# Altium PCB PCB1.PcbDoc
Units mil, origin at the board's own origin, x right, y up, seen from the top; angles counter-clockwise.
Board outline 1825.03 x 1420.03 mil, 2 copper layers (Top Layer, Bottom Layer); 34 components, 24 nets, 110 pads, 193 vias.
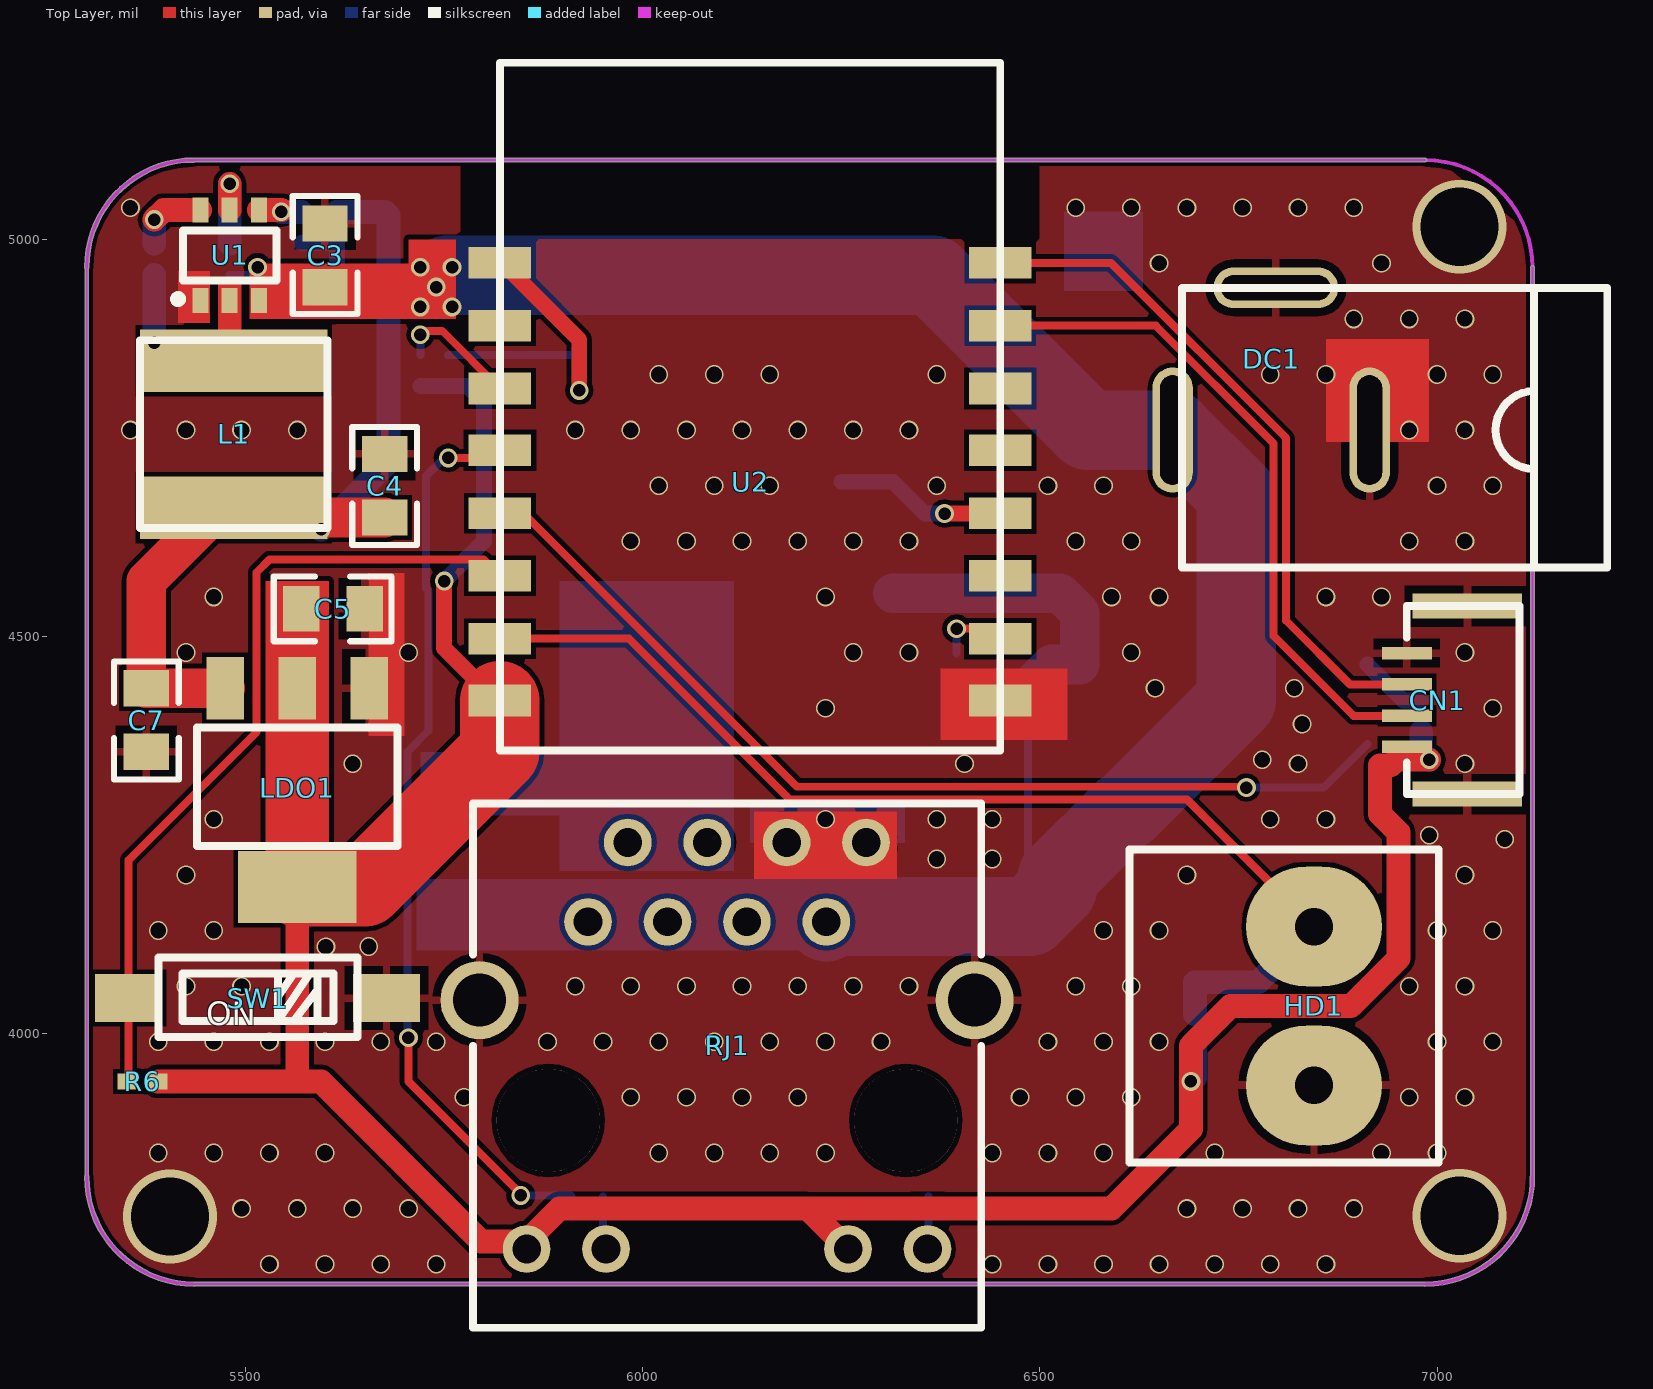
[diagram p0: Top Layer view]
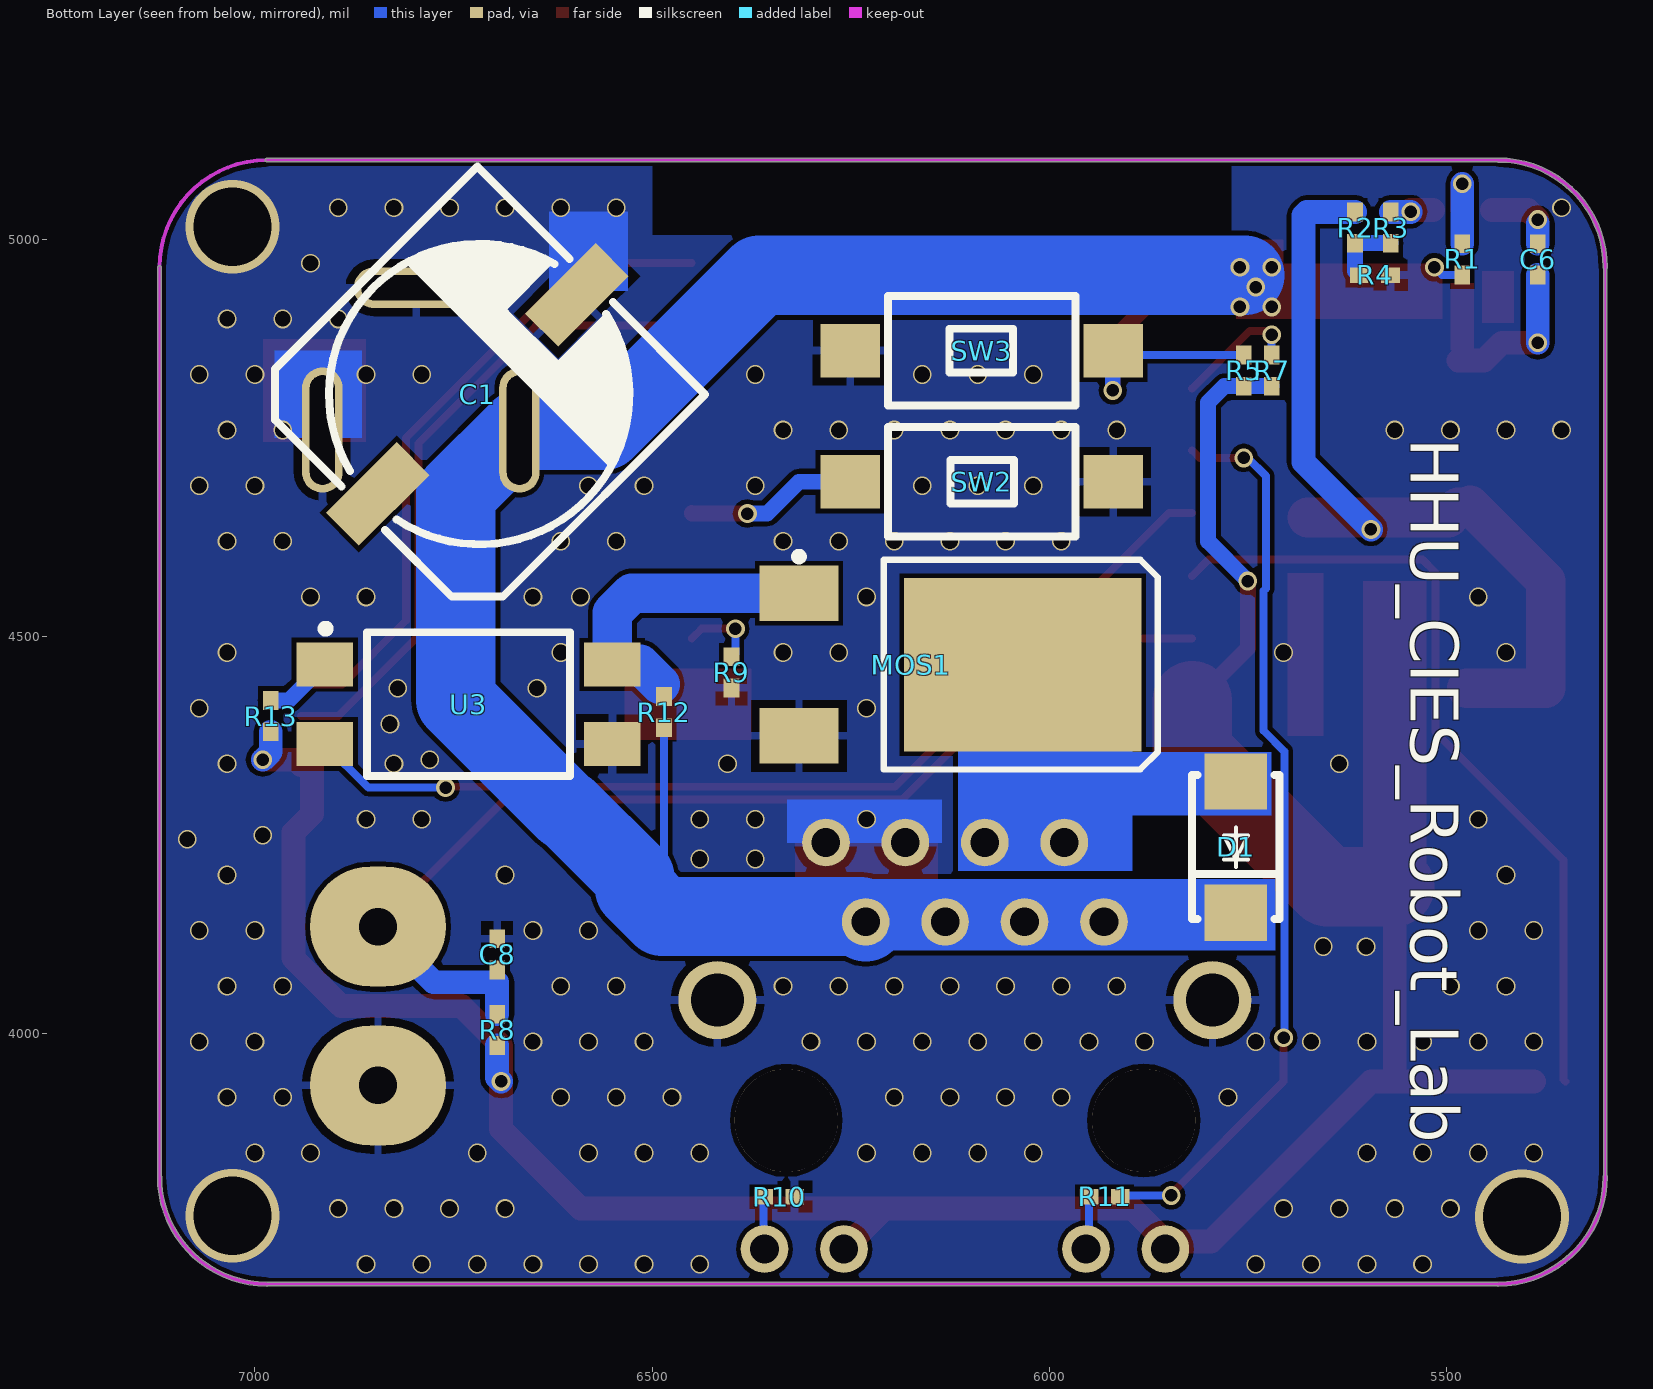
[diagram p1: Bottom Layer view, seen from below]

## Layer stack, top to bottom
Top Solder: solder mask 0.4, Solder Resist, Dk 3.5
Top Layer: signal copper 1.4
Dielectric 1: dielectric 12.6, FR-4, Dk 4.8
Bottom Layer: signal copper 1.4
Bottom Solder: solder mask 0.4, Solder Resist, Dk 3.5

## Board outline
5297.48,3820 cw(c5300,3820) 5298.02,3821.55 5298.02,4963.45 cw(c5300,4965) 5297.48,4965 cw(c5435,4965) 5435,5102.52 cw(c5435,5100) 5436.55,5101.98 6985,5101.98 cw(c6985,5100) 6986.98,5100 cw(c6985,5100) 6985,5098.02 5436.55,5098.02 cw(c5435,5100) 5435,5097.48 ccw(c5435,4965) 5302.52,4965 cw(c5300,4965) 5301.98,4963.45 5301.98,3821.55 cw(c5300,3820) 5302.52,3820 ccw(c5435,3820) 5435,3687.51 cw(c5435,3685) 5436.55,3686.98 6983.45,3686.98 cw(c6985,3685) 6985,3687.51 ccw(c6985,3820) 7117.48,3820 cw(c7120,3820) 7118.02,3821.55 7118.02,4965 cw(c7120,4965) 7121.98,4965 7121.98,3821.55 cw(c7120,3820) 7122.52,3820 cw(c6985,3820) 6985,3682.49 cw(c6985,3685) 6983.45,3683.02 5436.55,3683.02 cw(c5435,3685) 5435,3682.49 cw(c5435,3820)

## Design rules (kind name [scope] priority, off if disabled: settings)
Clearance [All] p1: gap=6
PolygonConnect PolygonConnect_1 [IsVia] p1: connectstyle=Direct reliefconductorwidth=10 reliefentries=4 polygonreliefangle="90 Angle" airgapwidth=10
PolygonConnect [All] p2: connectstyle=Relief reliefconductorwidth=10 reliefentries=4 polygonreliefangle="90 Angle" airgapwidth=10
RoutingVias [All] p1: holewidth=28 width=50 viastyle="Through Hole" minholewidth=28 minwidth=50 maxholewidth=28 maxwidth=50
SolderMaskExpansion [All] p1: expansion=4
Width [All] p1: maxlimit=10000 minlimit=10 preferedwidth=10
30 further rules are at their usual default settings.

## Components (designator, comment, footprint, x,y, rotation, side; value= is the part's Value field where it differs from the comment)
C1 "220uF" CAP-SMD_BD10.0-L10.3-W10.3-FD 6720,4805 r135 bottom
C3 "22uF" 0805 5600,4980 r270 top
C4 "106" 0805 5675,4690 r90 top
C5 "106" 0805 5610,4535 r0 top
C6 "104" 0402 5385,4975 r90 bottom
C7 "22uF" 0805 5375,4395 r90 top
C8 "104" 0402 6695,4100 r90 bottom
CN1 "1.0T-4P" 1.0T-4P-LT 7000,4420 r90 top
D1 "SS54_C123946" SMA_L4.4-W2.8-LS5.4-RD 5765,4235 r90 bottom
DC1 "DC005-2.5MM" DC-5020 6790.99,4849.55 r180 top
HD1 "PowerHeader" PowerHeader 6595,3825 r0 top
L1 "6.8uH" L-SMD-6.0X6.0X4.7 5485,4755 r270 top
LDO1 "SPX1117M3-L/TR" SOT-223 5565,4310 r270 top
MOS1 "NCE30H15K" DPAK228P970X238-3N 6474.13,4839.76 r270 bottom
R1 "100K" 0402 5480,4975 r270 bottom
R2 "40.2K" 0402 5615,5015 r270 bottom
R3 "10K" 0402 5570,5015 r90 bottom
R4 "7.68K" 0402 5590,4955 r180 bottom
R5 "1K" 0402 5755,4835 r90 bottom
R6 "1K" 0402 5370,3940 r0 top
R7 "1K" 0402 5720,4835 r90 bottom
R8 "1K" 0402 6695,4005 r270 bottom
R9 "10K" 0402 6400,4455 r270 bottom
R10 "4.7K" 0402 6340,3795 r180 bottom
R11 "4.7K" 0402 5930.31,3795 r0 bottom
R12 "4.7K" 0402 6485,4405 r90 bottom
R13 "390R" 0402 6980,4400 r270 bottom
RJ1 "R-RJ45S08P-C000" RJ45-TH_12PIN_R-RJ45S08P-C000_PITCH2.54-TL 6106.1,3985 r0 top
SW1 "SDA01H1SBD" SDA01H1SBD 5515,4045 r90 top
SW2 "Button_Liu" SW-SMD_L6.0-W3.5-LS8.0 6085,4695 r180 bottom
SW3 "Button_Liu" SW-SMD_L6.0-W3.5-LS8.0 6085,4860 r0 bottom
U1 "BL8032CB6TR" SOT-23-6 5480,4980 r0 top
U2 "ESP-07" ESP-07 6135,4695 r270 top
U3 "CYPC817(C-TP2)" SOP-4_4PIN-L4.83-W10.20-PITCH2.54-BL 6731.1,4420 r270 bottom

## Footprints (in the part's own frame and the unit in brackets; to place one, negate y for a bottom-side part, rotate by r counter-clockwise, add the part's x,y. Pads: shape width x height; smd on the part's side, far side on the other; paste and mask are expansions set on the pad)
1.0T-4P-LT [mm]
  rect 0.8x3.5 smd: 0(-3.005,-0.969) 0(3.005,-0.969)
  rect 0.4x1.6 smd: 1(-1.493,0.969) 2(-0.493,0.969) 3(0.507,0.969) 4(1.507,0.969)
  silkscreen extent -3,-2.63 3.01,0.97
0402 [mm] "Chip Capacitor, Body 1.0x0.5mm, IPC High Density"
  rect 0.6x0.5 smd: 1(-0.5,0) 2(0.5,0)
  body extent -0.55,-0.3 0.55,0.3, height 1.3
0805 [mm]
  rect 1.16x1.45 smd: 1(-1.016,0) 2(1.016,0)
  silkscreen extent -1.9,-1.03 1.87,1.04
CAP-SMD_BD10.0-L10.3-W10.3-FD [mm]
  rect 3.2x1.5 smd: 1(-4.5,0) 2(4.5,0)
  silkscreen extent -5.15,-5.15 5.15,5.15
DC-5020 [mm]
  oval 1.3x4 hole 0.8 slot 3.5 at 90 deg: 1(3.15,2.275) 2(-3.15,2.275)
  oval 4x1.3 hole 0.8 slot 3.5 at 0 deg: 3(-0.15,-2.275)
  silkscreen extent -10.75,-2.28 2.85,6.67
DPAK228P970X238-3N [mm] "D-PAK, 3-Pads, Body 6.21x6.73mm (max), IPC Medium Density"
  rect 1.778x2.54 smd: 1(7.245,4.042) 3(11.805,4.042)
  rect 5.55x7.6 smd: 4(9.525,11.198)
  silkscreen extent 5.95,3.92 12.88,15.52
ESP-07 [mil]
  rect 39.9x79.2 smd: 1(-275.5,-315) 2(-196.5,-315) 3(-117.5,-315) 4(-39.5,-315) 5(39.5,-315) 6(118.5,-315) 7(197.5,-315) 8(275.5,-315) 9(275.5,315) 10(197.5,315) 11(118.5,315) 12(39.5,315) 13(-39.5,315) 14(-117.5,315) 15(-196.5,315) 16(-275.5,315)
  silkscreen extent -528,-315 339,315
L-SMD-6.0X6.0X4.7 [mm]
  rect 2x6 smd: 1(-2.35,0) 2(2.35,0)
  silkscreen extent -3,-3 3,3
PowerHeader [mm]
  oval 4.34x3.832 hole 1.2: 1(6.35,7.874) 2(6.35,2.794)
  silkscreen extent 0.45,0.33 10.34,10.33
RJ45-TH_12PIN_R-RJ45S08P-C000_PITCH2.54-TL [mil]
  round 60 hole 36: 1(-175,155.91) 2(-125,255.91) 3(-75,155.91) 4(-25,255.91) 5(25,155.91) 6(75,255.91) 7(125,155.91) 8(175,255.91) 9(-252.36,-255.91) 11(152.36,-255.91) 12(252.36,-255.91)
  round 60 hole 35.98: 10(-152.36,-255.91)
  round 98.42 hole 66.93: 13(-311.61,57.48) 14(311.61,57.48)
  round 129.92 hole 129.92 unplated: ""(-225,-94.09) ""(225,-94.09)
  silkscreen extent -320,-355 320,305
SDA01H1SBD [mil]
  rect 60x84.6 smd: 1(0,-162.4) 2(0,162.4)
  silkscreen extent -49,-126 51,124
SMA_L4.4-W2.8-LS5.4-RD [mm]
  rect 1.8x2 smd: 1(-2.1,0) 2(2.1,0)
  silkscreen extent -2.3,-1.4 2.3,1.4
SOP-4_4PIN-L4.83-W10.20-PITCH2.54-BL [mm]
  rect 1.4x1.8 smd: 1(-1.143,-4.6) 2(1.397,-4.6) 3(1.397,4.6) 4(-1.143,4.6)
  silkscreen extent -2.41,-4.7 2.43,3.25
SOT-23-6 [mil]
  rect 20.1x31.5 smd: 1(-37,-57) 2(0,-57) 3(37,-57) 4(37,57) 5(0,57) 6(-37,57)
  silkscreen extent -70,-60 59,31
SOT-223 [mm]
  rect 2x1.2 smd: 1(-3.175,2.3) 2(-3.175,0) 3(-3.175,-2.3)
  rect 2.3x3.8 smd: 4(3.175,0)
  silkscreen extent -1.93,-3.2 1.87,3.2
SW-SMD_L6.0-W3.5-LS8.0 [mm]
  rect 1.9x1.7 smd: 1(-4.2,0) 2(4.2,0)
  silkscreen extent -3,-1.75 3,1.75

## Part data
C3 C7: library part 1uF
C4 C5 C6 C8: library part 0.1UF-16V(+-10%)(0402)
MOS1: library part IRLR7843
R1 R2 R3 R4 R9 R10 R11 R12 R13: library part 1K

## Via types
v1: diameter 23.62, hole 19.68, Top Layer to Bottom Layer, tented both sides, 168 vias
v2: diameter 23.62, hole 15.75, Top Layer to Bottom Layer, 22 vias
v3: diameter 118.11, hole 98.43, Top Layer to Bottom Layer, 3 vias

## Nets (pads, with @x,y where several pads share a name; then routed paths per layer and width w, separated by ;. In a path a pad name is that pad's centre, name@x,y a point inside that pad or via, vN(x,y) a via of type N, cw(c..) or ccw(c..) an arc to the next point about the centre after c; other vN are vias at no path point)
3V3: C5.1 CN1.1 LDO1.2 LDO1.4 R5.1 R6.2 R7.1 R8.2 R13.2 RJ1.9 RJ1.11 U2.8 | length 3536.1
  Top Layer w20: v2@5750,4565 5750,4485.32 5815.82,4419.5 U2.8
  Top Layer w30: R6.2 5565,3940 ; LDO1.4 5565,3940 ; RJ1.9 RJ1.9@5853.74,3738.74 ; 6157.56,3780 6207.56,3780 ; RJ1.11 6207.56,3780 ; v2(6990,4345) 6948.74,4345 6941.86,4338.12 6928.24,4338.12 6928.24,4276.93 6951.43,4253.74 6951.43,4095.06 6891.38,4035 6740,4035 6690,3985 v2(6690,3940) 6690,3880 6590,3780 6379.68,3780 6379.59,3780.09 6337.34,3780.09 6337.24,3780 6207.56,3780 ; 5565,3940 5595,3940 5796.26,3738.74 RJ1.9@5853.74,3738.74 ; RJ1.9@5853.74,3738.74 5895.1,3780.09 6207.46,3780.09 6207.56,3780
  Top Layer w100: LDO1.4 5650,4185 5820,4355 U2.8
  Bottom Layer w20: R7.1 R5.1 5779.69,4815.31 5800,4795 5800,4620 v2(5750,4570)
  Bottom Layer w30: v2(6690,3940) 6695,3945 R8.2 ; R13.2 6980,4355 v2(6990,4345)
5V: C4.1 C7.2 L1.2 LDO1.3 R2.1 | length 1061.1
  Top Layer w50: L1.2@5470,4665 5375,4570 C7.2 LDO1.3 ; L1.2 5497.48,4650 C4.1
  Bottom Layer w30: v2(5595,4635) 5680,4720 5680,5030 5675.31,5034.69 R2.1
12V: C1.1 C3.2 D1.1 DC1.1 R1.2 R12.1 RJ1.1 RJ1.3 RJ1.5 RJ1.7 U1.3 | length 2264.6
  Bottom Layer w10: R1.2 5505.31,4955.31 v2(5515,4965) ; R12.1 6485,4219.46 6521.96,4182.5
  Bottom Layer w100: 5753.75,4955 6365,4955 6560,4760 DC1.1 6747.25,4679.73 6747.25,4420.07 6608.63,4281.44 6606.44,4281.44 6521.96,4196.96 6521.96,4182.5 6487.16,4147.69 6237.89,4147.69 RJ1.7
  other v2: 5720,4915 5760,4915 5740,4940 5720,4965 5760,4965
EN: R7.2 U2.3 | length 150.3
  Top Layer w10: v2@5725,4885 5747.5,4885 U2.3
  Bottom Layer w10: R7.2 v2(5720,4880)
GND: C1.2 C3.1 C4.2 C5.2 C7.1 C8.2 CN1.0 CN1.4 DC1.2 DC1.3 HD1.2 LDO1.1 MOS1.3 R4.2 R9.2 R10.2 RJ1.6 RJ1.8 RJ1.13 RJ1.14 SW1.1 SW2.2 SW3.2 U1.1 U2.9 U3.3
  other v1: 5530,3710 5600,3710 5670,3710 5740,3710 6440,3710 6510,3710 6580,3710 6650,3710 6720,3710 6790,3710 6860,3710 5495,3780 5565,3780 5635,3780 5705,3780 6685,3780 6755,3780 6825,3780 6895,3780 5390,3850 5460,3850 5530,3850 5600,3850 6020,3850 6090,3850 6160,3850 6230,3850 6440,3850 6510,3850 6580,3850 6720,3850 6930,3850 7000,3850 5775,3920 5985,3920 6055,3920 6125,3920 6195,3920 6475,3920 6545,3920 6615,3920 6965,3920 7035,3920 5390,3990 5460,3990 5530,3990 5600,3990 5670,3990 5740,3990 5880,3990 5950,3990 6020,3990 6090,3990 6160,3990 6230,3990 6300,3990 6510,3990 6580,3990 6650,3990 7000,3990 7070,3990 5425,4060 5495,4060 5915,4060 5985,4060 6055,4060 6125,4060 6195,4060 6265,4060 6335,4060 6545,4060 6615,4060 6965,4060 7035,4060 5601.1,4109.6 5655,4110 5390,4130 5460,4130 6580,4130 6650,4130 7000,4130 7070,4130 5425,4200 6685,4200 7035,4200 6370,4220 6440,4220 7085,4245 6990,4250 5460,4270 6230,4270 6370,4270 6440,4270 6790,4270 6860,4270 5635,4340 6405,4340 6825,4340 7035,4340 6780,4345 6830,4390 6230,4410 7070,4410 6645,4435 6820,4435 5425,4480 5705,4480 6265,4480 6335,4480 6615,4480 7035,4480 5460,4550 6230,4550 6590,4550 6650,4550 6860,4550 6930,4550 5985,4620 6055,4620 6125,4620 6195,4620 6265,4620 6335,4620 6545,4620 6615,4620 6965,4620 7035,4620 6020,4690 6090,4690 6160,4690 6370,4690 6510,4690 6580,4690 7000,4690 7070,4690 5355,4760 5425,4760 5495,4760 5565,4760 5915,4760 5985,4760 6055,4760 6125,4760 6195,4760 6265,4760 6335,4760 6965,4760 7035,4760 6020,4830 6090,4830 6160,4830 6370,4830 6790,4830 6860,4830 7000,4830 7070,4830 6895,4900 6965,4900 7035,4900 6650,4970 6930,4970 5355,5040 6545,5040 6615,5040 6685,5040 6755,5040 6825,5040 6895,5040
  other v3: 5405,3770 7028,3771 7028,5016
GPIO0: SW2.1 U2.12 | length 216.4
  Top Layer w20: v2(6380,4655) 6449.5,4655 U2.12
  Bottom Layer w20: SW2.1 6315,4695 6355,4655 v2(6380,4655)
GPIO12: R6.1 SW1.2 U2.6 | length 1029.9
  Top Layer w10: R6.1 5352.6,3942.29 SW1.2 5352.6,4218.6 5514,4380 5514,4581 5530,4597 5799.5,4597 U2.6
GPIO13: C8.1 HD1.1 R8.1 U2.7 | length 1394.5
  Top Layer w10: U2.7 5982.5,4497.5 6185,4295 6685,4295 HD1.1
  Bottom Layer w30: R8.1 6695,4065 6775,4065 HD1.1
GPIO14: U2.5 U3.2 | length 1252.7
  Top Layer w10: U2.5 5849.5,4655.5 6194,4311 v2@6755,4311
  Bottom Layer w10: v2(6760,4310) 6857.2,4310 U3.2
GPIO16: R11.1 U2.4 | length 1145.2
  Top Layer w10: v2(5705,3995) 5705,3940 v2@5850,3795 ; v2(5755,4725) 5810.5,4725 U2.4
  Bottom Layer w10: v2@5704,3995 5704,4355.56 5730,4381.56 5730,4557.74 5727.19,4560.55 5727.19,4702.19 v2@5750,4725 ; v2(5846.49,3796.62) 5909.01,3796.62 R11.1
MAG_N: D1.2 MOS1.4 RJ1.2 RJ1.4
NetC6_1: C6.1 L1.1 U1.2 | length 194.6
  Top Layer w30: v2(5385,4870) 5430,4870 5452.48,4847.52 L1.1
  Bottom Layer w30: v2(5385,4870) C6.1
NetC6_2: C6.2 U1.6 | length 88.3
  Top Layer w30: v2(5385,5025) 5397,5037 U1.6
  Bottom Layer w30: C6.2 v2@5385,5020
NetMOS1_1: MOS1.1 R12.2 U3.4 | length 380.5
  Bottom Layer w50: MOS1.1 6525.47,4554.53 6550,4530 U3.4 6515,4465 6490,4440
NetR1_1: R1.1 U1.5 | length 108.3
  Top Layer w30: U1.5 v2(5480,5070)
  Bottom Layer w30: R1.1 v2(5480,5070)
NetR2_2: R2.2 R3.1 R4.1 | length 87.5
  Bottom Layer w20: R3.1 R2.2 5615,4960.31 R4.1
NetR3_2: R3.2 U1.4 | length 53.1
  Top Layer w30: U1.4 v2@5545,5037
  Bottom Layer w30: v2(5545,5035) 5545.32,5034.69 R3.2
NetR9_1: R9.1 U2.10 | length 91.1
  Top Layer w10: v2(6395,4510) 6437.5,4510 U2.10
  Bottom Layer w10: R9.1@6395,4479.05 v2(6395,4510)
NetR10_1: R10.1 RJ1.12 | length 66.4
  Bottom Layer w10: RJ1.12 6359.69,3730.32 R10.1
NetR11_2: R11.2 RJ1.10 | length 67.5
  Bottom Layer w10: R11.2 5950,3732.83 RJ1.10
NetR13_1: R13.1 U3.1 | length 86.6
  Bottom Layer w20: U3.1 6957.52,4419.68 R13.1
RST: R5.2 SW3.1 U2.1 | length 415.8
  Top Layer w20: U2.1 5823.18,4970.5 5920,4873.68 v2@5920,4815
  Bottom Layer w10: R5.2 5914.34,4854.69 SW3.1
  Bottom Layer w20: SW3.1 5920,4859.65 v2(5920,4810)
RX: CN1.2 U2.15 | length 837.3
  Top Layer w10: U2.15 6645.87,4891.5 6794,4743.37 6794,4501 6894.73,4400.27 CN1.2@6941.86,4400.27
TX: CN1.3 U2.16 | length 846.5
  Top Layer w10: U2.16 6589.5,4970.5 6810,4750 6810,4520 6890.35,4439.65 CN1.3@6941.86,4439.65
pads on no net: RJ1. U2.2 U2.11 U2.13 U2.14

## Polygon pours and split planes (outlines as drawn)
GND on Bottom Layer "Bottom Layer-No Net" (solid, remove dead copper, pour order 0): 5307.03,5097.48 7122.04,5097.48 7118.02,3785.11 7085,3720 7005.15,3683.97 5298.02,3683.43
GND on Top Layer "Bottom Layer-No Net" (solid, remove dead copper, pour order 2): 5301.98,5100 7121.98,5100 7121.98,3655 5296.91,3655

## Keep-outs
Keep-Out Layer:
  lines w3.94: 5300,3820 5300,4965 ; 5435,3685 6985,3685 ; 5435,5100 6985,5100 ; 7120,3820 7120,4965
  lines w5: 5300,3820 ccw(c5435,3820) 5435,3685 ; 5300,4965 cw(c5435,4965) 5435,5100 ; 6985,3685 ccw(c6985,3820) 7120,3820 ; 6985,5100 cw(c6985,4965) 7120,4965

## Other copper
Top Layer:
  rectangle net NetC6_1: 5465,4860 5495,4945
  rectangle net 12V: 5505,4900 5765,4970
  rectangle net 12V: 5705,4900 5765,5000
  rectangle net 3V3: 5525,4190 5605,4570
  rectangle net GND: 6860,4745 6990,4875
  rectangle net GND: 6375,4370 6535,4460
  rectangle net GND: 6140,4195 6320,4280
  rectangle net GND: 5415,4895 5455,4960
  rectangle net GND: 5655,4375 5700,4580
  pour cut-out: 6995,5105 7000,5100 7121.98,5100 7121.98,5006.98 7120,5005
  pour cut-out: 5770,5100 5770,5000 6500,5000 6500,5100
Bottom Layer:
  rectangle net GND: 6135,4240 6330,4295
  rectangle net MAG_N: 5895,4205 6115,4570
  rectangle net 12V: 5715,4105 6305,4195
  rectangle net MAG_N: 5720,4275 5950,4355
  rectangle net GND: 6530,4935 6630,5035
  rectangle net GND: 6865,4750 6975,4860
  pour cut-out: 5770,5100 6500,5100 6500,5005 5770,5005

## Silkscreen, mask and mechanical layers (free items; w line width, h text height)
Bottom Overlay:
  text "HHU_CIES_Robot_Lab" at 5545,4750 h60 r90

## Text inside footprints (layer, text, board x,y; h text height)
SW1: Top Overlay "ON" at 5450.6,4011 h30